# EAGLE board tic-tac-toe (EAGLE 6.5.0)
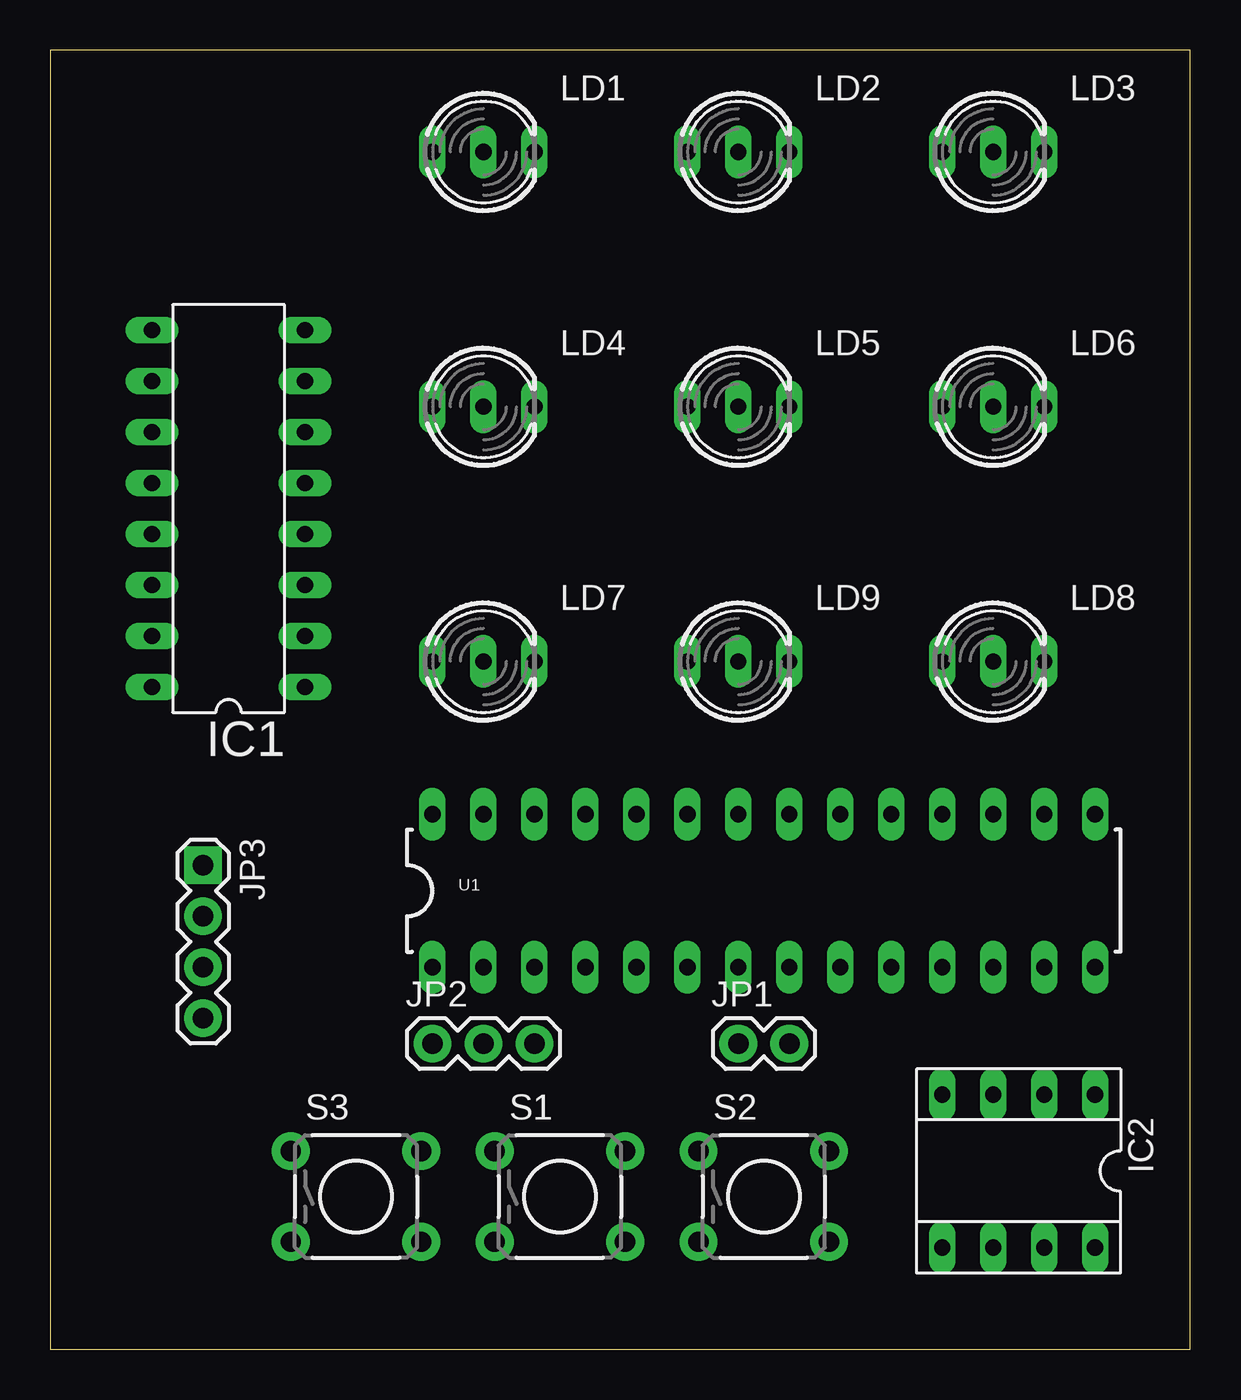
[diagram p0: board, top side]
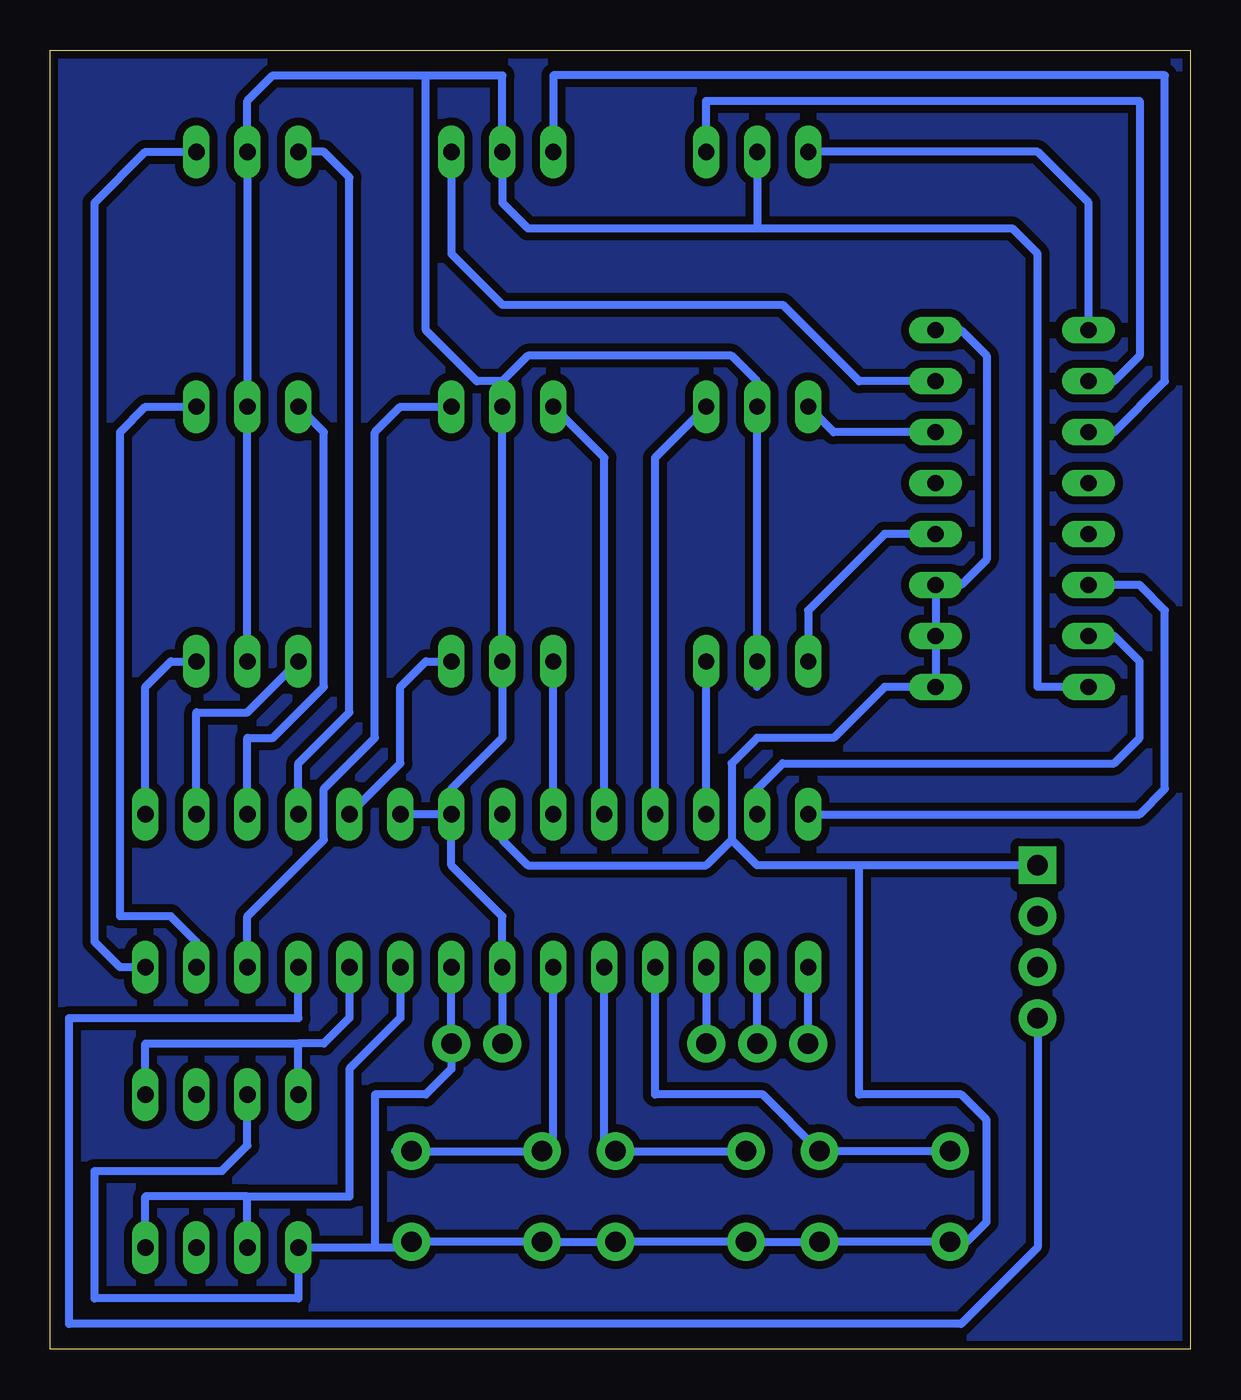
[diagram p1: board, bottom side, seen from below]

Size 56.82 x 64.76 mm. Coordinates in mm from the lower left corner, seen from the top.
Outline: 0,0 56.82,0 56.82,64.76 0,64.76 0,0
Copper layers (1*16): Top 0.035mm / dielectric 1.5mm / Bottom 0.035mm
Design rules "bastli": minimum track width 0.4mm, minimum drill 0.1mm, track to track 0.4mm, track to pad 0.4mm, pad to pad 0.4mm, via to via 0.4mm, smd to smd 0.4mm, copper to edge 0.4mm, drill to drill 0.4mm, minimum pad ring 10mil, minimum via ring 8mil, stop-mask expansion 4mil, vias tented up to drill 0mil, thermal gap 10mil

## Footprints (pad centres in the part's own frame; a part is rotated, then mirrored left to right if it is on the bottom)
DIL16 = drill 0.813 long: 1 -8.89,-3.81; 2 -6.35,-3.81; 3 -3.81,-3.81; 4 -1.27,-3.81; 5 1.27,-3.81; 6 3.81,-3.81; 7 6.35,-3.81; 8 8.89,-3.81; 9 8.89,3.81; 10 6.35,3.81; 11 3.81,3.81; 12 1.27,3.81; 13 -1.27,3.81; 14 -3.81,3.81; 15 -6.35,3.81; 16 -8.89,3.81
SOCKET-08 = drill 0.813 long: 1 -3.81,-3.81; 2 -1.27,-3.81; 3 1.27,-3.81; 4 3.81,-3.81; 5 3.81,3.81; 6 1.27,3.81; 7 -1.27,3.81; 8 -3.81,3.81
1X02 = drill 1.016 pad 1.88: 1 0,0; 2 2.54,0
1X03 = drill 1.016 pad 1.88: 1 0,0; 2 2.54,0; 3 5.08,0
1X04 = drill 1.016 pad 1.88 square: 1 0,0 | drill 1.016 pad 1.88: 2 2.54,0; 3 5.08,0; 4 7.62,0
DUOLED-C-5MM = drill 0.813 long: AR 2.54,0; AX -2.54,0; C 0,0
TACTILE-PTH = drill 1.016 pad 1.88: 1 -3.251,2.261; 2 3.251,2.261; 3 -3.251,-2.261; 4 3.251,-2.261
DIL28-3 = drill 0.813 long: 1 -16.51,-3.81; 2 -13.97,-3.81; 3 -11.43,-3.81; 4 -8.89,-3.81; 5 -6.35,-3.81; 6 -3.81,-3.81; 7 -1.27,-3.81; 8 1.27,-3.81; 9 3.81,-3.81; 10 6.35,-3.81; 11 8.89,-3.81; 12 11.43,-3.81; 13 13.97,-3.81; 14 16.51,-3.81; 15 16.51,3.81; 16 13.97,3.81; 17 11.43,3.81; 18 8.89,3.81; 19 6.35,3.81; 20 3.81,3.81; 21 1.27,3.81; 22 -1.27,3.81; 23 -3.81,3.81; 24 -6.35,3.81; 25 -8.89,3.81; 26 -11.43,3.81; 27 -13.97,3.81; 28 -16.51,3.81

## Placement (x,y rotation side)
IC1  PCF8574P  [DIL16]  8.89,41.91 90 top
IC2  [SOCKET-08]  48.26,8.89 180 top
JP1  M02PTH  [1X02]  34.29,15.24 0 top
JP2  [1X03]  19.05,15.24 0 top
JP3  [1X04]  7.62,24.13 270 top
LD1  [DUOLED-C-5MM]  21.59,59.69 0 top
LD2  [DUOLED-C-5MM]  34.29,59.69 0 top
LD3  [DUOLED-C-5MM]  46.99,59.69 0 top
LD4  [DUOLED-C-5MM]  21.59,46.99 0 top
LD5  [DUOLED-C-5MM]  34.29,46.99 0 top
LD6  [DUOLED-C-5MM]  46.99,46.99 0 top
LD7  [DUOLED-C-5MM]  21.59,34.29 0 top
LD8  [DUOLED-C-5MM]  46.99,34.29 0 top
LD9  [DUOLED-C-5MM]  34.29,34.29 0 top
S1  [TACTILE-PTH]  25.4,7.62 0 top
S2  [TACTILE-PTH]  35.56,7.62 0 top
S3  [TACTILE-PTH]  15.24,7.62 0 top
U1  ATMEGA328P_PDIP  [DIL28-3]  35.56,22.86 0 top

## Library data of the parts
IC1 = micro-philips; MPN: PCF8574PN; OC_FARNELL: 204020; OC_NEWARK: 11N8515
IC2 = ic-package
JP1-JP3 = SparkFun-Connectors
LD1-LD9 = led
S1-S3 = SparkFun-Electromechanical
U1 = SparkFun-DigitalIC

## Nets
GND: IC1.1 IC1.2 IC1.3 IC1.8 IC2.3 IC2.5 JP1.2 JP3.1 S1.3 S1.4 S2.3 S2.4 S3.3 S3.4 U1.8 U1.22
RESET: JP2.1 U1.1
RX: JP2.2 U1.2
S$2: S2.1 S2.2 U1.6
S$3: LD3.AR U1.14
S$4: LD6.AR U1.13
S$5: LD8.AR U1.15
S$6: LD9.AR U1.19
S$7: LD8.AX U1.16
S$8: LD6.AX U1.17
S$9: LD3.AX U1.18
S$10: JP3.4 U1.11
S$11: LD5.AR U1.12
S$12: LD9.AX U1.23
S$13: LD5.AX U1.24
S$14: LD4.AR U1.25
S$15: IC1.6 LD4.AX
S$16: LD7.AR U1.26
S$17: IC1.4 LD7.AX
S$18: IC1.11 LD2.AX
S$19: IC1.7 LD2.AR
S$20: IC1.9 LD1.AX
S$21: IC1.10 LD1.AR
SCL: IC1.14 U1.28
SDA: IC1.15 U1.27
TAC1->PD3: S1.1 S1.2 U1.5
TAC3->PD2: S3.1 S3.2 U1.4
TX: JP2.3 U1.3
VCC: IC1.16 JP1.1 LD1.C LD2.C LD3.C LD4.C LD5.C LD6.C LD7.C LD8.C LD9.C U1.7 U1.20 U1.21
XTAL1: IC2.6 IC2.8 U1.9
XTAL2: IC2.1 IC2.4 U1.10

## Tracks (layer width: path | path; a pad name or v marks a point on that pad's centre or on a via)
GND
  Bottom 0.406: S1.4 S1.3 S3.4 S3.3 11.15,5.36 10.16,6.35 10.16,11.43 11.43,12.7 16.51,12.7 16.51,24.13 | U1.8 JP1.2 36.83,13.97 38.1,12.7 40.64,12.7 40.64,5.08 | IC1.8 11.43,50.8 10.16,49.53 10.16,39.37 11.43,38.1 IC1.3 IC1.2 IC1.1 15.24,33.02 17.78,30.48 21.59,30.48 22.86,29.21 22.86,25.4 | 40.64,5.08 IC2.5 44.45,2.54 54.61,2.54 54.61,8.89 48.26,8.89 46.99,10.16 IC2.3 | 40.64,5.08 39.09,5.08 S2.4 S2.3 S1.4 | S1.4 28.65,5.79 | 22.86,25.4 24.13,24.13 33.02,24.13 34.29,25.4 U1.22 | JP3.1 16.51,24.13 | 16.51,24.13 21.59,24.13 22.86,25.4
RESET
  Bottom 0.406: JP2.1 U1.1
RX
  Bottom 0.406: JP2.2 U1.2
S$1
  pour Bottom: 0,64.77 57.15,64.77 57.15,0 0,0
S$2
  Bottom 0.406: 39.65,9.88 S2.2 S2.1 | 31.75,17.78 U1.6 31.75,10.16 32.03,9.88 | S2.1 32.03,9.88 | S2.1 32.31,9.6 32.03,9.88
S$3
  Bottom 0.406: U1.14 53.34,19.05 54.61,20.32 54.61,57.15 52.07,59.69 LD3.AR
S$4
  Bottom 0.406: U1.13 49.53,20.32 50.8,21.59 53.34,21.59 53.34,45.72 52.07,46.99 LD6.AR
S$5
  Bottom 0.406: U1.15 52.07,33.02 50.8,34.29 LD8.AR
S$6
  Bottom 0.406: U1.19 39.37,29.21 39.37,33.02 38.1,34.29 LD9.AR
S$7
  Bottom 0.406: U1.16 49.53,31.75 46.99,31.75 LD8.AX
S$8
  Bottom 0.406: LD6.AX 43.18,45.72 43.18,33.02 45.72,30.48 46.99,30.48 U1.17
S$9
  Bottom 0.406: 44.45,27.94 U1.18 44.45,29.21 41.91,31.75 41.91,58.42 43.18,59.69 LD3.AX
S$10
  Bottom 0.406: JP3.4 7.62,5.08 11.43,1.27 55.88,1.27 55.88,16.51 44.45,16.51 U1.11
S$11
  Bottom 0.406: U1.12 46.99,21.59 43.18,25.4 43.18,27.94 40.64,30.48 40.64,45.72 39.37,46.99 LD5.AR
S$12
  Bottom 0.406: U1.23 LD9.AX
S$13
  Bottom 0.406: U1.24 29.21,44.45 LD5.AX
S$14
  Bottom 0.406: U1.25 26.67,44.45 LD4.AR
S$15
  Bottom 0.406: IC1.6 17.78,45.72 LD4.AX
S$16
  Bottom 0.406: 24.13,33.02 LD7.AR U1.26
S$17
  Bottom 0.406: IC1.4 15.24,40.64 19.05,36.83 LD7.AX
S$18
  Bottom 0.406: IC1.11 3.81,45.72 1.27,48.26 1.27,63.5 31.75,63.5 LD2.AX
S$19
  Bottom 0.406: IC1.7 16.51,48.26 20.32,52.07 34.29,52.07 36.83,54.61 LD2.AR
S$20
  Bottom 0.406: IC1.9 5.08,57.15 7.62,59.69 LD1.AX
S$21
  Bottom 0.406: LD1.AR 24.13,62.23 2.54,62.23 2.54,49.53 3.81,48.26 IC1.10
SCL
  Bottom 0.406: U1.28 2.54,26.67 1.27,27.94 1.27,36.83 2.54,38.1 IC1.14
SDA
  Bottom 0.406: U1.27 21.59,27.94 20.32,29.21 3.81,29.21 2.54,30.48 2.54,34.29 3.81,35.56 IC1.15
TAC1->PD3
  Bottom 0.406: S1.1 S1.2 28.93,9.88 29.21,10.16 U1.5
TAC3->PD2
  Bottom 0.406: S3.1 S3.2 | S3.2 18.77,9.88 | S3.2 21.31,12.7 26.67,12.7 U1.4
TX
  Bottom 0.406: U1.3 JP2.3
VCC
  Bottom 0.406: LD8.C LD6.C LD3.C 46.99,62.23 45.72,63.5 38.1,63.5 | 21.59,55.88 8.89,55.88 7.62,54.61 7.62,33.02 IC1.16 | 38.1,63.5 34.29,63.5 LD2.C 34.29,57.15 33.02,55.88 21.59,55.88 | LD1.C 21.59,55.88 | U1.21 U1.20 | 21.59,33.02 LD7.C LD4.C 21.59,48.26 22.86,49.53 33.02,49.53 34.29,48.26 | U1.21 36.83,27.94 34.29,30.48 LD9.C LD5.C 34.29,48.26 | JP1.1 U1.7 34.29,21.59 36.83,24.13 U1.21 | 34.29,48.26 35.56,48.26 38.1,50.8 38.1,63.5
XTAL1
  Bottom 0.406: 46.99,7.62 52.07,7.62 IC2.8 | IC2.6 46.99,7.62 | 46.99,7.62 41.91,7.62 41.91,13.97 39.37,16.51 U1.9
XTAL2
  Bottom 0.406: IC2.4 44.45,15.24 | IC2.1 52.07,15.24 44.45,15.24 | 44.45,15.24 43.18,15.24 41.91,16.51 U1.10